# EAGLE board hb daughterboard (EAGLE 5.11)
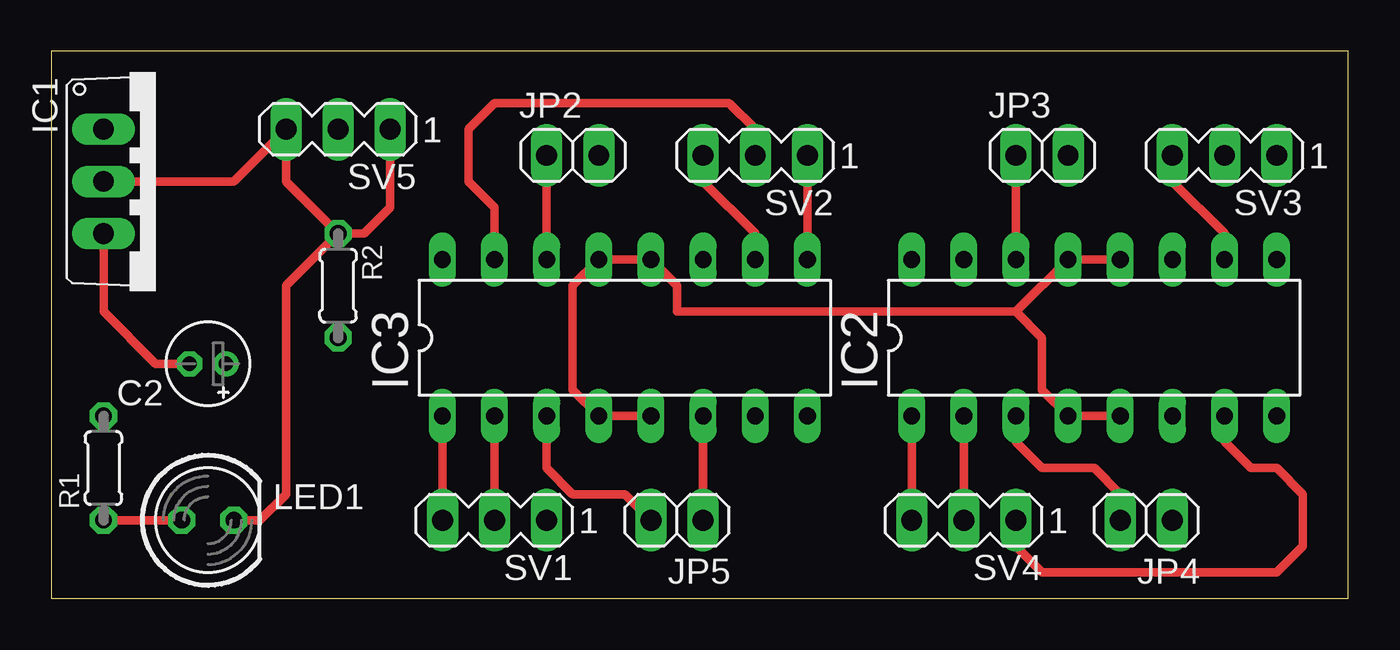
[diagram p0: board, top side]
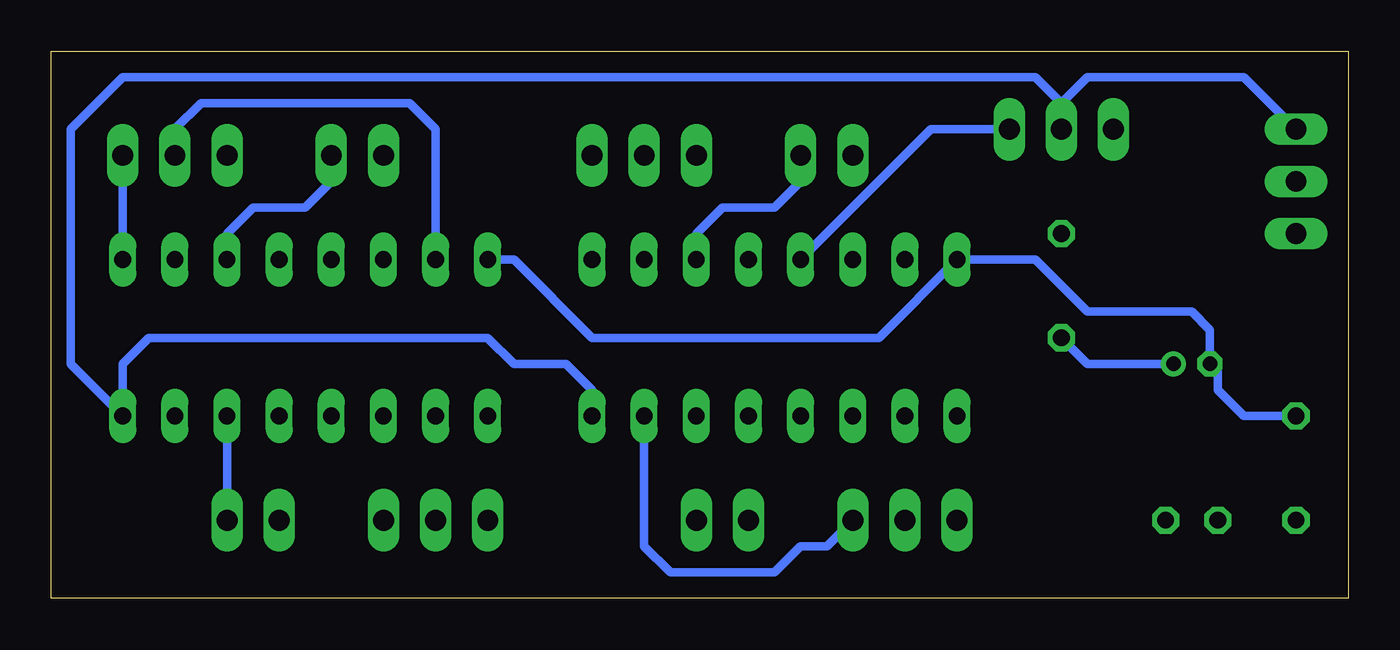
[diagram p1: board, bottom side, seen from below]

Size 63.17 x 26.66 mm. Coordinates in mm from the lower left corner, seen from the top.
Outline: 0,0 63.17,0 63.17,26.66 0,26.66 0,0
Copper layers (1*16): Top 0.035mm / dielectric 1.5mm / Bottom 0.035mm
Design rules "default": minimum track width 10mil, minimum drill 24mil, track to track 8mil, track to pad 8mil, pad to pad 8mil, via to via 8mil, smd to smd 8mil, copper to edge 40mil, drill to drill 8mil, minimum pad ring 10mil, minimum via ring 8mil, stop-mask expansion 4mil, vias tented up to drill 0mil, thermal gap 10mil

## Footprints (pad centres in the part's own frame; a part is rotated, then mirrored left to right if it is on the bottom)
E1,8-4 = drill 0.711 pad 1.168 round: + -0.889,0 | drill 0.711 pad 1.168 octagon: - 0.889,0
TO220V = drill 1.016 long: 1 -2.54,-2.54; 2 0,-2.54; 3 2.54,-2.54
DIP16 = drill 0.813 long: 1 -10.16,-3.81; 2 -7.62,-3.81; 3 -5.08,-3.81; 4 -2.54,-3.81; 5 0,-3.81; 6 2.54,-3.81; 7 5.08,-3.81; 8 7.62,-3.81; 9 7.62,3.81; 10 5.08,3.81; 11 2.54,3.81; 12 0,3.81; 13 -2.54,3.81; 14 -5.08,3.81; 15 -7.62,3.81; 16 -10.16,3.81
1X02 = drill 1.016 long: 1 -1.27,0; 2 1.27,0
LED5MM = drill 0.813 octagon: A -1.27,0; K 1.27,0
0204/5 = drill 0.813 octagon: 1 -2.54,0; 2 2.54,0
MA03-1 = drill 1.016 long: 1 -2.54,0; 2 0,0; 3 2.54,0

## Placement (x,y rotation side)
C2  100nF  [E1,8-4]  7.62,11.43 180 top
IC1  7805TV  [TO220V]  5.08,20.32 270 top
IC2  SN754410  [DIP16]  52.07,12.7 0 top
IC3  SN754410  [DIP16]  29.21,12.7 0 top
JP2  [1X02]  25.4,21.59 0 top
JP3  [1X02]  48.26,21.59 0 top
JP4  [1X02]  53.34,3.81 180 top
JP5  [1X02]  30.48,3.81 180 top
LED1  [LED5MM]  7.62,3.81 0 top
R1  330  [0204/5]  2.54,6.35 90 top
R2  15M  [0204/5]  13.97,15.24 270 top
SV1  [MA03-1]  21.59,3.81 180 top
SV2  [MA03-1]  34.29,21.59 180 top
SV3  [MA03-1]  57.15,21.59 180 top
SV4  [MA03-1]  44.45,3.81 180 top
SV5  [MA03-1]  13.97,22.86 180 top

## Library data of the parts
C2 = rcl
IC1 = linear
IC2 IC3 = HBridge
JP2-JP5 = pinhead
LED1 = led
R1 R2 = resistor
SV1-SV5 = con-lstb; OC_FARNELL: unknown; OC_NEWARK: unknown

## Nets
GND: IC1.2 IC2.4 IC2.5 IC2.12 IC2.13 IC3.4 IC3.5 IC3.12 IC3.13 LED1.K R2.1 SV5.1 SV5.3
N$1: C2.- IC1.3 IC2.16 IC3.16 R1.2
N$2: IC1.1 IC2.8 IC3.8 SV5.2
N$3: IC3.1 SV1.3
N$4: IC3.2 SV1.2
N$5: IC3.7 SV1.1
N$6: IC3.3 JP5.2
N$7: IC3.6 JP5.1
N$8: IC3.11 JP2.2
N$9: IC3.14 JP2.1
N$10: IC3.9 SV2.1
N$11: IC3.15 SV2.2
N$12: IC3.10 SV2.3
N$13: IC2.1 SV4.3
N$14: IC2.2 SV4.2
N$15: IC2.7 SV4.1
N$16: IC2.3 JP4.2
N$17: IC2.6 JP4.1
N$18: IC2.11 JP3.2
N$19: IC2.14 JP3.1
N$20: IC2.9 SV3.1
N$21: IC2.15 SV3.2
N$22: IC2.10 SV3.3
N$23: C2.+ R2.2
N$25: LED1.A R1.1

## Tracks (layer width: path | path; a pad name or v marks a point on that pad's centre or on a via)
GND
  Top 0.406: LED1.K 10.16,3.81 11.43,5.08 11.43,15.24 R2.1 | SV5.1 16.51,19.05 15.24,17.78 R2.1 | 46.99,13.97 30.48,13.97 30.48,15.24 IC3.12 IC3.13 25.4,15.24 25.4,10.16 IC3.4 IC3.5 | 46.99,13.97 IC2.13 IC2.12 | IC2.5 IC2.4 48.26,10.16 48.26,12.7 46.99,13.97 | IC1.2 8.89,20.32 SV5.3 11.43,20.32 R2.1
  Bottom 0.406: SV5.1 20.32,22.86 IC3.13
N$1
  Top 0.406: IC1.3 2.54,13.97 5.08,11.43 C2.-
  Bottom 0.406: R1.2 5.08,8.89 6.35,10.16 6.35,11.05 C2.- 6.73,13.08 7.62,13.97 12.7,13.97 15.24,16.51 IC3.16 22.86,12.7 36.83,12.7 40.64,16.51 IC2.16
N$2
  Bottom 0.406: IC3.8 36.83,10.16 38.1,11.43 40.64,11.43 41.91,12.7 58.42,12.7 59.69,11.43 IC2.8 62.23,11.43 62.23,22.86 59.69,25.4 15.24,25.4 13.97,24.13 | IC1.1 5.08,25.4 12.7,25.4 13.97,24.13 | 13.97,24.13 SV5.2
N$3
  Top 0.406: IC3.1 SV1.3
N$4
  Top 0.406: SV1.2 IC3.2
N$5
  Bottom 0.406: SV1.1 25.4,2.54 26.67,2.54 27.94,1.27 33.02,1.27 34.29,2.54 IC3.7
N$6
  Top 0.406: IC3.3 24.13,6.35 25.4,5.08 27.94,5.08 JP5.2
N$7
  Top 0.406: IC3.6 JP5.1
N$8
  Bottom 0.406: JP2.2 26.67,20.32 27.94,19.05 30.48,19.05 31.75,17.78 IC3.11
N$9
  Top 0.406: JP2.1 IC3.14
N$10
  Top 0.406: SV2.1 IC3.9
N$11
  Top 0.406: IC3.15 21.59,19.05 20.32,20.32 20.32,22.86 21.59,24.13 33.02,24.13 34.29,22.86 SV2.2
N$12
  Top 0.406: SV2.3 31.75,20.32 34.29,17.78 IC3.10
N$13
  Top 0.406: IC2.1 SV4.3
N$14
  Top 0.406: SV4.2 IC2.2
N$15
  Top 0.406: SV4.1 46.99,2.54 48.26,1.27 59.69,1.27 60.96,2.54 60.96,5.08 59.69,6.35 58.42,6.35 57.15,7.62 IC2.7
N$16
  Top 0.406: IC2.3 46.99,7.62 48.26,6.35 50.8,6.35 52.07,5.08 JP4.2
N$17
  Bottom 0.406: IC2.6 JP4.1
N$18
  Bottom 0.406: JP3.2 49.53,20.32 50.8,19.05 53.34,19.05 54.61,17.78 IC2.11
N$19
  Top 0.406: JP3.1 IC2.14
N$20
  Bottom 0.406: SV3.1 IC2.9
N$21
  Bottom 0.406: IC2.15 44.45,22.86 45.72,24.13 55.88,24.13 57.15,22.86 SV3.2
N$22
  Top 0.406: SV3.3 54.61,20.32 57.15,17.78 IC2.10
N$23
  Bottom 0.406: C2.+ 12.7,11.43 R2.2
N$25
  Top 0.406: R1.1 LED1.A